# Altium PCB BMS_slave.PcbDoc (part 5 of 5)
Units mm, origin at the board's own origin, x right, y up, seen from the top; angles counter-clockwise.
Board outline 124.71 x 100.58 mm, 4 copper layers (Layer 1 - Top Layer, Layer 2 - GND, Layer 3 - Signal, Layer 4 - Bottom Layer), stack 1.56 mm thick; 370 components, 202 nets, 969 pads, 371 vias.
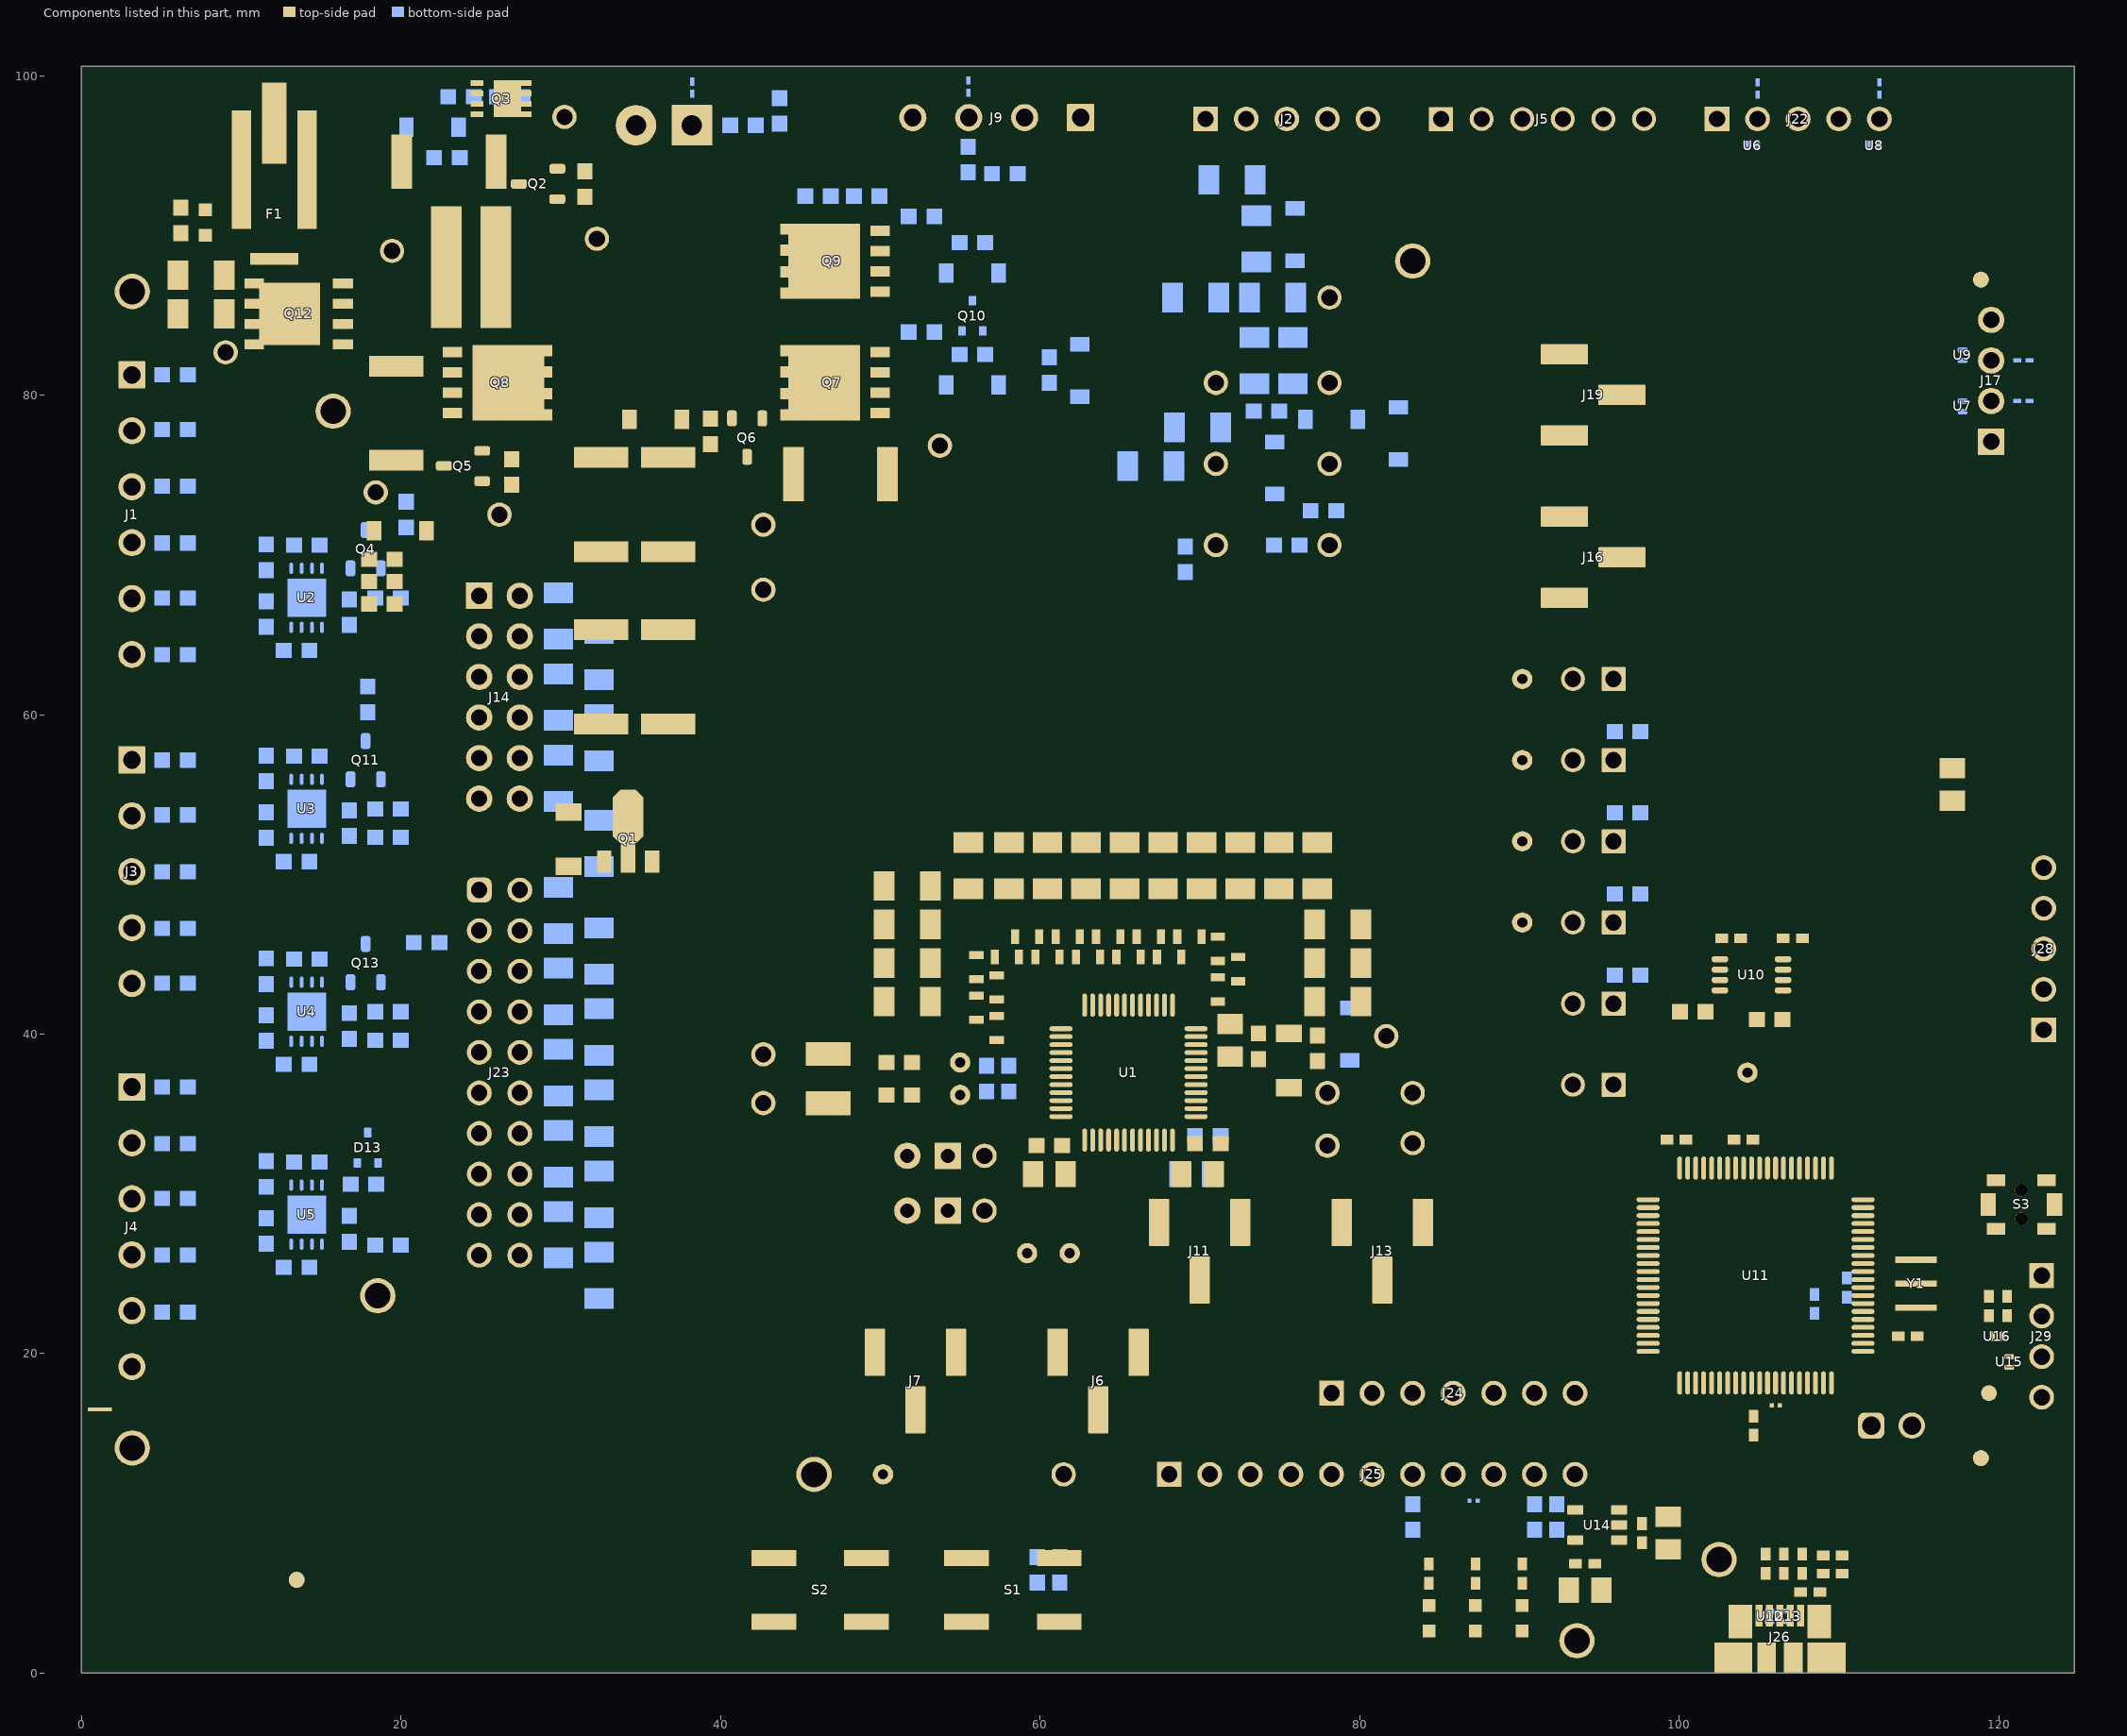
[diagram p6: the components of this part, seen from the top]

## Other copper
Layer 1 - Top Layer:
  region net VSS: 70.231,30.353 72.263,30.353 72.898,30.988 72.898,32.639 71.882,33.655 70.739,33.655 70.739,32.639 70.231,32.131
  pour cut-out: 66.802,11.176 94.615,11.176 94.615,13.716 66.802,13.716
  pour cut-out: 77.076,18.682 77.076,20.955 77.851,20.955 77.851,18.682
  pour cut-out: 85.109,1.848 89.389,1.848 89.389,2.032 85.109,2.032
  region net 3.3V: 94.005,3.658 94.869,2.794 94.869,1.524 93.98,0.635 91.694,0.635 91.059,1.27 91.059,6.011 90.72,6.35 83.693,6.35 83.312,6.731 83.312,8.636 83.693,9.017 93.675,9.017 94.005,8.687
  region net VBUS: 105.207,2.899 105.207,5.172 104.534,5.845 104.534,7.496 103.391,8.639 95.771,8.639 95.644,8.512 95.644,7.607 98.422,4.829 104.508,4.829 104.775,4.563 104.775,2.899
  region net QGND: 96.266,4.191 94.652,4.191 94.285,4.558 94.285,9.195 94.691,9.601 96.977,9.601 97.155,9.779 97.155,10.668 97.663,11.176 99.949,11.176 100.203,10.922 100.203,9.144 100,8.941 95.682,8.941 95.377,8.636 95.377,7.366 96.672,6.071 96.672,4.597 96.647,4.572
  pour cut-out: 94.28,8.961 94.28,9.317 94.564,9.601 95.58,9.601 95.58,9.881 94.132,9.881 93.98,9.728 93.98,8.961
  region net NetJ26_6: 104.572,4.318 104.572,2.184 104.826,1.93 107.747,1.93 108.026,2.21 108.026,4.394 108.331,4.699 108.331,5.334 108.458,5.461 109.454,5.461 110.49,4.425 110.49,-0.051 102.184,-0.051 102.184,3.632 102.87,4.318
  region net QGND: 118.872,17.272 119.38,16.764 120.523,16.764 120.523,18.034 118.872,18.034
  pour cut-out: 96.647,17.272 113.157,17.272 113.157,33.147 96.647,33.147
  region net QGND: 113.487,24.79 113.563,24.867 116.154,24.867 116.357,25.07 116.764,25.07 116.764,23.698 116.357,23.698 116.154,23.901 113.563,23.901 113.487,23.978
  pour cut-out: 123.943,27.056 123.943,31.618 118.881,31.618 118.881,27.056
  pour cut-out: 35.941,48.375 35.953,48.387 36.957,48.387 36.957,48.641 35.941,48.641
  pour cut-out: 51.27,40.731 52.108,40.731 52.108,50.582 51.27,50.582
  region net VSS: 17.018,86.106 17.018,78.613 16.256,77.851 15.24,77.851 14.478,78.613 14.478,81.661 15.621,82.804 15.621,86.106
  region net NetF1_2: 12.319,90.424 14.986,87.757 14.986,82.931 13.843,81.788 8.382,81.788 7.239,82.931 7.239,85.725 7.62,86.106 9.652,86.106 10.033,86.487 10.033,89.154 10.668,89.789 11.176,89.789 11.811,90.424
  region net NetQ5_3: 23.622,74.676 23.241,74.295 20.32,74.295 19.431,75.184 17.907,75.184 17.526,75.565 17.526,77.47 18.034,77.978 20.955,77.978 21.463,77.47 21.463,76.835 21.971,76.327 23.241,76.327 23.622,75.946
  pour cut-out: 17.138,77.47 17.138,81.407 17.399,81.407 17.653,81.153 17.653,77.851 17.272,77.47
  region net 16P: 1.016,79.375 0.254,80.137 0.254,91.567 0.254,99.568 1.016,100.33 11.049,100.33 11.811,99.568 11.811,93.948 11.811,91.186 10.922,90.297 9.398,90.297 8.509,91.186 8.128,91.186 5.588,91.186 4.953,90.551 4.953,84.074 7.112,81.915 7.112,80.137 6.35,79.375
  region net FBAT: 12.319,99.568 13.081,100.33 24.638,100.33 25.273,99.695 25.273,98.171 25.121,98.019 24.105,98.019 23.876,97.79 23.876,79.756 23.749,79.629 19.304,79.629 17.526,81.407 17.526,88.011 17.018,88.519 14.986,88.519 12.319,91.186
  region net NetQ2_3: 24.892,92.837 28.067,92.837 28.067,96.52 27.686,96.901 27.051,96.901 25.781,96.901 24.384,95.504 24.384,93.345
  region net NetD2_1: 35.179,79.121 36.957,77.343 37.973,77.343 38.481,76.835 38.481,73.279 37.846,72.644 30.734,72.644 30.099,73.279 30.099,77.343 31.877,79.121
  region net CD: 24.384,91.059 24.384,77.724 24.384,75.336 27.267,75.336 28.28,76.349 29.178,77.248 29.4,77.47 31.559,79.629 35.306,79.629 37.084,77.851 41.275,77.851 41.656,78.232 41.656,79.121 42.164,79.629 43.053,79.629 43.561,79.121 43.561,78.232 43.815,77.978 48.387,77.978 48.768,78.359 48.768,90.932 48.641,91.059 27.686,91.059 26.924,91.821 24.892,91.821 24.384,91.313
  region net CPACK+: 25.781,97.917 25.781,97.409 28.194,97.409 28.905,96.698 28.905,93.472 32.258,93.472 33.782,91.948 43.307,91.948 44.196,92.837 44.196,98.298 43.307,99.187 36.83,99.187 35.687,100.33 26.416,100.33 25.781,99.695
  region net PACK+: 57.023,97.282 57.023,75.438 54.61,73.025 48.26,73.025 47.752,73.533 47.752,76.708 49.276,78.232 49.276,81.661 49.403,81.788 50.8,81.788 51.181,82.169 51.181,83.439 50.419,84.201 49.657,84.201 49.276,84.582 49.276,89.281 49.403,89.408 50.8,89.408 51.181,89.789 51.181,91.313 50.546,91.948 48.857,91.948 47.752,93.053 47.752,96.774 47.752,97.917 49.022,99.187 55.118,99.187
  region net QGND: 101.778,42.951 103.17,42.951 103.251,42.871 103.251,42.723 101.778,42.723
  region net QGND: 116.586,55.067 116.408,55.245 115.759,55.245 115.759,54.356 118.429,54.356 118.429,55.245 117.729,55.245 117.551,55.067
  region net PGND: 116.586,56.185 116.408,56.007 115.759,56.007 115.759,56.896 118.429,56.896 118.429,56.007 117.729,56.007 117.551,56.185
  region net QGND: 116.332,54.991 116.078,54.737 116.078,53.467 118.11,53.467 118.11,54.737 117.856,54.991
  region net PGND: 117.856,56.261 118.11,56.515 118.11,57.785 116.078,57.785 116.078,56.515 116.332,56.261
  pour cut-out: 118.237,78.359 118.237,85.979 120.777,85.979 120.777,78.359
  region net 4P: 3.048,34.798 4.318,34.798 12.192,42.672 15.367,42.672 17.907,40.132 17.907,37.465 21.336,34.036 21.336,26.797 20.701,26.162 19.685,26.162 19.05,26.797 19.05,29.448 16.748,31.75 2.921,31.75 2.032,32.639 2.032,33.782
  region net 8P: 13.716,48.514 19.05,43.18 19.05,39.624 19.685,38.989 20.701,38.989 21.336,39.624 21.336,48.26 18.034,51.562 18.034,54.356 17.018,55.372 11.938,55.372 8.368,51.802 3.034,51.802 2.032,50.8 2.032,49.53 3.048,48.514
  region net 12P: 2.032,66.802 3.175,65.659 8.509,65.659 19.072,55.095 19.072,52.197 19.685,51.584 20.679,51.584 21.291,52.197 21.291,59.01 16.039,64.262 16.039,66.802 16.039,67.781 14.986,68.834 3.175,68.834 2.032,67.691
  pour cut-out: 23.622,53.467 28.702,53.467 28.702,68.707 23.622,68.707
  region net VSS: 19.05,67.785 21.049,67.785 22.733,69.469 22.733,72.517 21.336,72.517 19.05,70.231
  region net NetC71_1: 30.226,62.103 29.464,61.341 29.464,52.832 30.226,52.07 33.274,52.07 33.655,51.689 33.655,50.038 34.798,50.038 34.798,51.689 35.179,52.07 35.687,52.07 36.83,53.213 36.83,55.626 39.751,58.547 39.751,61.341 38.989,62.103
  region net NetR6_1: 34.29,63.373 33.528,62.611 30.226,62.611 29.464,63.373 29.464,71.374 30.226,72.136 34.29,72.136
  region net NetR5_1: 34.925,63.373 35.687,62.611 38.989,62.611 39.751,63.373 39.751,71.374 38.989,72.136 34.925,72.136
  region net PGND: 48.26,37.592 48.768,38.1 48.768,38.354 48.26,38.862 48.26,50.8 68.199,70.739 68.199,97.282 66.294,99.187 59.436,99.187 57.531,97.282 57.531,75.184 37.592,55.245 37.592,41.402 41.402,37.592
  region net NetQ6_3: 41.275,75.311 43.561,73.025 46.736,73.025 47.244,73.533 47.244,76.327 46.787,76.784 41.275,76.784
  pour cut-out: 79.032,48.065 78.194,48.065 78.194,40.69 79.032,40.684
  pour cut-out: 54.193,50.965 54.193,50.127 78.649,50.127 78.649,50.965
  region net VSS: 0.889,17.018 0.635,17.272 0,17.272 0,15.748 0.635,15.748 0.889,16.002
  region net BAT-: 1.397,11.557 2.921,10.033 38.862,10.033 48.26,19.431 48.26,35.56 48.768,36.068 48.768,36.322 48.26,36.83 41.402,36.83 37.592,33.02 37.592,24.003 34.29,20.701 3.302,20.701 1.397,18.796
  pour cut-out: 51.181,12.446 51.562,12.446 54.356,15.24 54.356,20.447 52.451,20.447 52.451,14.732 51.181,13.462
  pour cut-out: 61.087,33.147 69.977,33.147 69.977,42.037 61.087,42.037
  region net VSS: 73.152,38.989 73.152,37.338 74.422,36.068 76.454,36.068 76.454,37.338 74.803,38.989
Layer 2 - GND:
  pour cut-out: 40.005,95.123 33.02,95.123 33.02,98.552 40.005,98.552
  pour cut-out: 110.744,14.224 115.824,14.224 115.824,16.764 110.744,16.764
  pour cut-out: 53.34,86.348 54.864,86.348 54.864,86.614 53.34,86.614
  pour cut-out: 55.527,96.131 57.15,96.131 57.15,96.393 55.527,96.393
  pour cut-out: 118.237,78.359 118.237,85.979 120.777,85.979 120.777,78.359
  pour cut-out: 23.622,53.467 28.702,53.467 28.702,68.707 23.622,68.707
Layer 3 - Signal:
  pour cut-out: 58.039,52.439 79.756,52.439 79.756,53.086 58.039,53.086
  pour cut-out: 23.241,68.707 23.241,53.467 28.702,53.467 28.702,68.707
  pour cut-out: 39.878,95.123 33.02,95.123 33.02,98.552 39.878,98.552
  pour cut-out: 53.34,86.348 54.864,86.348 54.864,86.614 53.34,86.614
  pour cut-out: 55.527,96.131 57.15,96.131 57.15,96.393 55.527,96.393
  pour cut-out: 94.746,36.26 94.742,35.179 94.996,35.179 94.996,36.26
  pour cut-out: 110.744,14.224 115.824,14.224 115.824,16.764 110.744,16.764
  pour cut-out: 123.848,19.812 123.848,22.352 121.516,22.352 121.516,19.812
  pour cut-out: 120.624,28.437 120.624,30.237 121.158,30.237 121.158,28.437
  pour cut-out: 118.237,78.359 118.237,85.979 120.777,85.979 120.777,78.359
  pour cut-out: 23.749,24.892 23.749,50.292 30.226,50.292 30.226,24.892
Layer 4 - Bottom Layer:
  pour cut-out: 7.523,49.309 7.523,44.036 7.112,44.036 7.112,49.309
  region net VSS: 12.878,29.921 12.878,27.483 15.418,27.483 16.002,28.067 17.272,28.067 17.272,29.21 16.002,29.21 15.291,29.921
  region net 4P: 12.878,42.621 12.878,40.183 15.418,40.183 16.002,40.767 18.923,40.767 18.923,41.91 16.002,41.91 15.291,42.621
  region net 8P: 12.878,55.321 12.878,52.883 15.418,52.883 16.002,53.467 18.923,53.467 18.923,54.61 16.002,54.61 15.291,55.321
  pour cut-out: 32.421,15.934 32.421,61.559 31.623,62.357 28.067,62.357 27.432,61.722 27.432,60.109 24.996,57.673 24.996,19.685 26.162,18.519 29.809,18.519 29.809,15.934
  pour cut-out: 7.523,66.454 7.523,64.61 7.087,64.61 7.087,66.454
  pour cut-out: 7.523,64.61 7.523,66.454 7.16,66.454 7.16,64.61
  region net 12P: 12.878,68.529 12.878,66.091 15.418,66.091 16.002,66.675 18.923,66.675 18.923,67.818 16.002,67.818 15.291,68.529
  pour cut-out: 7.523,80.424 7.523,75.151 6.934,75.151 6.934,80.424
  region net FBAT: 23.622,98.298 23.495,98.171 22.86,98.171 22.606,97.917 22.606,94.361 19.762,94.361 19.762,99.264 20.193,99.695 23.241,99.695 23.622,99.314
  region net NetC29_1: 24.003,98.171 26.543,98.171 26.543,99.314 26.162,99.695 24.384,99.695 24.003,99.314
  region net CPACK+: 27.051,98.044 27.432,97.663 28.829,97.663 28.829,99.695 27.432,99.695 27.051,99.314
  pour cut-out: 33.038,96.888 33.038,94.818 33.35,94.818 33.35,96.888
  region net FBAT: 45.847,91.694 33.02,91.694 31.623,93.091 29.718,93.091 27.686,91.059 22.098,91.059 21.844,91.313 21.844,92.71 22.098,92.964 26.543,92.964 28.829,95.25 32.512,95.25 34.29,93.472 45.593,93.472 45.847,93.218
  region net NetC34_2: 41.656,96.266 41.91,96.012 44.069,96.012 44.323,96.266 44.323,97.409 44.069,97.663 41.91,97.663 41.656,97.409
  region net NetC37_1: 46.355,91.694 48.895,91.694 48.895,93.472 46.355,93.472
  region net PGND: 37.846,98.603 37.465,98.603 37.084,98.984 37.084,100.254 39.37,100.254 39.37,98.984 38.989,98.603 38.608,98.603 38.608,99.238 38.481,99.365 37.973,99.365 37.846,99.238
  region net CPACK+: 41.148,96.012 40.64,95.504 36.957,95.504 36.703,95.758 36.703,97.917 36.957,98.171 37.973,98.171 38.1,98.298 38.1,99.111 38.354,99.111 38.354,98.298 38.481,98.171 40.64,98.171 41.148,97.663
  region net PGND: 42.672,100.203 42.672,98.552 43.18,98.044 44.196,98.044 44.704,98.552 44.704,100.203
  region net PACK+: 49.403,91.948 50.8,91.948 51.181,92.329 51.181,94.361 49.784,94.361 49.403,93.98
  region net PACK+: 55.372,99.187 55.372,98.552 54.61,97.79 54.61,94.996 56.388,94.996 56.388,97.79 55.626,98.552 55.626,99.187
  region net PGND: 55.118,98.679 54.737,98.679 54.356,99.06 54.356,100.33 56.642,100.33 56.642,99.06 56.261,98.679 55.88,98.679 55.88,99.314 55.753,99.441 55.245,99.441 55.118,99.314
  region net NetC42_2: 54.991,94.488 54.991,93.218 57.531,93.218 57.531,94.488
  region net PGND: 58.039,93.218 58.42,92.837 59.69,92.837 59.69,94.869 58.42,94.869 58.039,94.488
  pour cut-out: 80.366,37.529 80.465,37.529 81.8,38.865 81.8,42.037 81.546,42.291 81.356,42.481 78.384,42.481 78.384,39.115 77.585,38.316 77.585,35.699 78.232,35.052 79.502,35.052 80.366,35.916
  pour cut-out: 81.788,96.012 82.157,96.012 82.157,96.215 81.788,96.215
  region net PGND: 118.237,79.172 118.237,78.867 117.272,78.867 117.094,79.045 117.094,79.096 117.17,79.172
  region net PGND: 118.237,82.626 118.237,82.906 117.246,82.906 117.094,82.753 117.094,82.702 117.17,82.626
  region net PGND: 120.904,78.994 121.285,78.613 123.063,78.613 123.063,83.185 121.285,83.185 120.904,82.804 120.904,82.55 121.539,82.55 121.666,82.423 121.666,81.915 121.539,81.788 120.904,81.788 120.904,80.01 121.539,80.01 121.666,79.883 121.666,79.375 121.539,79.248 120.904,79.248
  pour cut-out: 118.237,78.359 118.237,85.979 120.777,85.979 120.777,78.359
  region net PGND: 104.445,96.181 104.379,96.247 104.299,96.247 104.267,96.215 104.267,95.047 104.292,95.021 104.369,95.021 104.445,95.098
  region net PGND: 104.521,98.552 104.14,98.552 103.759,98.933 103.759,100.203 106.045,100.203 106.045,98.933 105.664,98.552 105.283,98.552 105.283,99.187 105.156,99.314 104.648,99.314 104.521,99.187
  region net PGND: 112.065,96.181 111.999,96.247 111.919,96.247 111.887,96.215 111.887,95.047 111.912,95.021 111.989,95.021 112.065,95.098
  region net PGND: 112.141,98.552 111.76,98.552 111.379,98.933 111.379,100.203 113.665,100.203 113.665,98.933 113.284,98.552 112.903,98.552 112.903,99.187 112.776,99.314 112.268,99.314 112.141,99.187
  region net QGND: 105.08,3.658 107.442,3.658 107.442,3.861 105.08,3.861
  pour cut-out: 107.315,8.216 107.315,8.763 106.934,9.144 106.934,19.685 107.442,20.193 109.347,20.193 109.855,19.685 110.49,19.685 110.871,20.066 110.871,22.098 110.49,22.479 109.855,22.479 108.356,20.98 107.086,20.98 106.172,20.066 106.172,10.033 104.648,8.509 104.648,8.001 105.029,7.62 106.934,7.62 107.315,8.001
  pour cut-out: 111.171,22.749 111.171,22.398 110.744,21.971 110.172,21.971 110.172,22.749
  pour cut-out: 123.975,39.103 123.546,39.103 123.546,47.879 123.975,47.879
  pour cut-out: 66.167,76.969 67.557,76.969 67.564,73.66 66.167,73.66
  pour cut-out: 69.431,76.672 70.485,76.672 70.485,79.284 69.431,79.284
  region net PGND: 61.722,78.867 63.754,78.867 63.754,80.899 61.722,80.899
  pour cut-out: 69.304,84.8 70.358,84.8 70.358,87.412 69.304,87.412
  pour cut-out: 71.59,92.166 72.644,92.166 72.644,94.778 71.59,94.778
  pour cut-out: 74.839,89.37 74.839,90.424 72.227,90.424 72.227,89.37
  pour cut-out: 72.068,79.466 77.03,79.466 77.03,80.264 72.068,80.264
  pour cut-out: 77.125,81.75 77.125,82.804 72.1,82.804 72.1,81.75
  pour cut-out: 23.622,53.467 28.702,53.467 28.702,68.707 23.622,68.707
  region net CD: 48.768,91.059 32.385,91.059 27.178,85.852 27.178,76.067 27.997,76.067 31.559,79.629 35.56,79.629 36.322,78.867 48.768,78.867
  region net PACK+: 55.499,77.343 56.261,76.581 66.167,76.581 66.421,76.327 66.421,74.676 66.167,74.422 55.372,74.422 54.737,74.422 53.213,75.946 52.705,76.454 52.705,81.534 54.483,83.312 54.483,84.328 54.737,84.582 55.245,84.582 55.499,84.328
  region net PACK+: 55.245,90.297 55.499,90.043 55.499,87.249 54.991,86.741 53.086,86.741 53.086,89.789 53.594,90.297
  pour cut-out: 61.732,9.652 61.732,11.684 61.214,11.684 61.214,9.652
  pour cut-out: 64.173,6.759 65.913,6.759 65.913,7.112 64.173,7.112
  pour cut-out: 66.916,11.28 66.916,13.612 94.361,13.612 94.361,11.28
  region net VSS: 70.104,32.131 72.898,32.131 72.898,30.988 72.517,30.607 71.628,30.607 71.374,30.353 70.104,30.353
  pour cut-out: 7.523,32.291 7.523,27 7.222,27 7.112,27 7.112,32.291

## Silkscreen, mask and mechanical layers (free items; w line width, h text height)
Top Overlay:
  text "EXT SPI" at 104.013,99.06 h1.91
  text "CPACK+" at 27.813,95.504 h1.27
  text "CPACK+" at 33.02,92.456 h1.91
  text "TS2" at 81.153,92.329 h1.91 r90
  text "PACK+" at 51.08,92.062 h1.91
  text "PACK-" at 58.286,92.062 h1.91
  text "VSS" at 70.993,91.948 h1.91 r90
  text "VSS" at 85.725,91.948 h1.91 r90
  text "REG1" at 76.073,91.059 h1.91 r90
  text "REG2" at 73.533,90.805 h1.91 r90
  text "DCHG" at 93.345,90.551 h1.91 r90
  text "DDSG" at 95.885,90.551 h1.91 r90
  text "Input 6A max" at 51.689,90.424 h1.91
  text "REGIN" at 78.613,90.17 h1.91 r90
  text "PACK-" at 102.997,90.043 h1.91 r90
  text "SPI_CS" at 105.537,89.408 h1.91 r90
  text "BAT+" at 0.635,88.646 h1.91
  text "SPI_CLK" at 108.077,88.265 h1.91 r90
  text "DFETOFF" at 88.265,87.63 h1.91 r90
  text "CFETOFF" at 90.805,87.63 h1.91 r90
  text "SPI_MISO" at 110.617,87.503 h1.91 r90
  text "SPI_MOSI" at 113.157,87.503 h1.91 r90
  text "FBAT" at 18.034,87.122 h1.27
  text "CD" at 31.496,86.741 h1.27
  text "RST_SHUT" at 98.425,86.487 h1.91 r90
  text "GND" at 81.534,83.82 h1.91
  text "PACK" at 76.581,83.058 h1.27
  text "uC_SCL" at 97.663,81.915 h1.91
  text "FUSE" at 9.779,81.28 h1.27
  text "CELL16" at 7.52,79.756 h1.91
  text "SCL" at 88.392,79.248 h1.91
  text "Dg" at 70.314,77.976 h1.27
  text "DSG" at 76.962,77.978 h1.27
  text "EXT I2C" at 117.856,77.724 h1.91 r90
  text "CELL15" at 7.52,77.156 h1.91
  text "uC_SPI_CLK" at 97.663,76.835 h1.91
  text "GND" at 13.97,75.692 h1.91
  text "CELL14" at 7.52,73.651 h1.91
  text "PACK+" at 52.07,73.533 h1.27
  text "FUSEPIN" at 19.431,72.898 h1.27
  text "LD" at 70.358,72.898 h1.27
  text "PCHG" at 76.581,72.898 h1.27
  text "uC_SDA" at 97.663,71.755 h1.91
  text "CELL13" at 7.52,70.146 h1.91
  text "Pcg" at 25.146,69.596 h1.27
  text "SDA" at 88.392,69.215 h1.91
  text "Pdg" at 41.656,69.088 h1.27
  text "CHG" at 69.977,67.818 h1.27
  text "PDSG" at 76.708,67.818 h1.27
  text "16" at 21.336,66.802 h1.91
  text "uC_SPI_MISO_A" at 97.663,66.675 h1.91
  text "CELL12" at 7.52,66.641 h1.91
  text "Cg" at 41.91,64.897 h1.27
  text "15" at 21.336,64.262 h1.91
  text "CELL11" at 7.52,63.135 h1.91
  text "14" at 21.336,61.722 h1.91
  text "CFETOFF" at 83.947,61.468 h1.27
  text "uC_SPI_CS" at 90.17,59.309 h1.91
  text "13" at 21.336,59.182 h1.91
  text "12" at 21.336,56.642 h1.91
  text "CELL10" at 7.52,56.557 h1.91
  text "HDQ" at 86.487,56.007 h1.27
  text "Cell simulator" at 30.226,55.499 h1.91 r90
  text "HDQ_PU" at 91.44,54.229 h1.91
  text "11" at 21.336,54.102 h1.91
  text "CELL9" at 7.52,53.052 h1.91
  text "SDA" at 86.741,51.054 h1.27
  text "CELL8" at 7.52,49.546 h1.91
  text "SDA_PU" at 91.44,49.149 h1.91
  text "10" at 21.336,48.387 h1.91
  text "SCL" at 86.741,46.101 h1.27
  text "CELL7" at 7.52,46.041 h1.91
  text "9" at 22.225,45.847 h1.91
  text "SCL_PU" at 91.44,44.069 h1.91
  text "8" at 22.225,43.307 h1.91
  text "CELL6" at 7.52,42.536 h1.91
  text "7" at 22.225,40.767 h1.91
  text "ALERT_PU" at 90.424,38.989 h1.91
  text "BAT" at 82.677,38.735 h1.27
  text "6" at 22.225,38.227 h1.91
  text "SRN" at 56.007,37.846 h1.27
  text "CELL5" at 7.52,35.957 h1.91
  text "SRP" at 56.007,35.814 h1.27
  text "5" at 22.225,35.687 h1.91
  text "CP1" at 79.121,35.179 h1.27
  text "GND" at 84.328,35.179 h1.27
  text "BAT-" at 37.846,34.417 h1.91
  text "uC_HDQ" at 91.186,33.909 h1.91
  text "TS1" at 55.499,33.401 h1.27
  text "4" at 22.225,33.147 h1.91
  text "Input 72V max" at 17.653,32.766 h1.91 r90
  text "Input 6A max" at 19.812,32.766 h1.91 r90
  text "CELL4" at 7.52,32.452 h1.91
  text "BREG" at 79.121,32.004 h1.27
  text "REGIN" at 84.328,32.004 h1.27
  text "Cell simulator" at 30.226,31.623 h1.91 r90
  text "3" at 22.225,30.607 h1.91
  text "CELL3" at 7.52,28.947 h1.91
  text "2" at 22.225,28.067 h1.91
  text "ALERT" at 60.579,27.178 h1.27
  text "PU" at 65.786,26.924 h1.91 r90
  text "PD" at 75.438,26.924 h1.91 r90
  text "TS3" at 55.499,25.908 h1.27
  text "1" at 22.352,25.527 h1.91
  text "CELL2" at 7.52,25.442 h1.91
  text "uC_HDQ" at 86.868,24.384 h1.91 r90
  text "REG18" at 57.277,23.495 h1.27
  text "CELL1" at 7.52,21.937 h1.91
  text "uC_SPI_MOSI" at 76.962,21.209 h1.91 r90
  text "GND" at 16.637,19.177 h1.91
  text "HDQ" at 82.042,19.177 h1.91 r90
  text "PD" at 57.658,18.796 h1.91 r90
  text "PU" at 59.436,18.796 h1.91 r90
  text "PD" at 69.088,18.796 h1.91 r90
  text "EXT" at 47.879,18.669 h1.91 r90
  text "BAT-" at 7.52,18.431 h1.91
  text "QGND" at 116.205,15.367 h1.91
  text "CFETOFF" at 70.612,15.113 h1.91 r90
  text "TS2" at 52.832,11.557 h1.91 r90
  text "TS2" at 49.149,9.652 h1.27
  text "REG1" at 59.563,9.398 h1.27
  text "VBUS" at 100.584,9.271 h1.91
  text "GND" at 44.069,8.89 h1.91
  text "DFETOFF" at 64.262,6.985 h1.91 r90
  text "BQ76952EVM" at 18.415,4.953 h2.75
  text "'.PRJ_Number'.PCB_Rev" at 18.415,2.667 h2.75
  text "USB" at 111.379,1.524 h1.91
  text "3.3V" at 95.885,1.016 h1.91
  text "WAKE" at 43.688,0.254 h1.91
  text "RESET" at 55.626,0.254 h1.91
M1 Board Outline:
  lines w0.254: -0.508,-0.508 -0.508,101.092 125.222,101.092 125.222,-0.508 -0.508,-0.508
  text ".Layer_Name" at 14.148,-22.314 h1.52
M2 Board Dimensions:
  rectangle: -0.508,-7.493 2.667,-4.318
  rectangle: 2.667,-10.668 12.192,-7.493
  lines w0.178: -0.508,-7.493 24.892,-7.493 ; 2.667,-10.668 2.667,-4.318 ; 5.842,-10.668 5.842,-4.318 ; 12.192,-10.668 12.192,-4.318 ; 18.542,-10.668 18.542,-4.318 ; -0.508,-10.668 -0.508,-4.318 24.892,-4.318 24.892,-10.668 -0.508,-10.668
  text ".Layer_Name" at 14.148,-22.314 h1.52
M3 3D STEP Top:
  text ".Layer_Name" at 14.148,-22.314 h1.52
M5 Assembly Top:
  lines w0.254: -7.925,-24.134 159.715,-24.134 ; -7.925,-18.97 159.766,-18.97 ; -7.925,-13.805 -7.925,-29.299 93.802,-29.299 159.766,-29.299 159.766,-13.805 -7.912,-13.805 -7.912,-29.299 32.106,-29.299 ; 54.686,-29.299 54.686,-13.805 ; 86.868,-18.97 86.868,-13.805 ; 108.204,-18.97 108.204,-13.805 ; 124.003,-29.464 124.003,-24.312
  text "COMPONENTS MARKED 'DNP' SHOULD NOT BE POPULATED." at 28.791,-8.598 h1.52
  text "ASSEMBLY VARIANT:" at 28.778,-11.532 h1.52
  text ".VariantName" at 55.093,-11.532 h1.52
  text "PCB VIEWED FROM TOP SIDE" at -6.312,-17.162 h1.52
  text "BOARD #:" at 56.591,-17.162 h1.52
  text ".PRJ_Number" at 70.447,-17.162 h1.52
  text "REV:" at 91.897,-17.162 h1.52
  text ".PCB_Rev" at 99.301,-17.162 h1.52
  text "SVN REV:" at 113.182,-17.162 h1.52
  text ".VersionControl_RevNumber" at 126.035,-17.162 h1.52
  text "TID #:" at 56.591,-22.327 h1.52
  text ".TID" at 70.447,-22.327 h1.52
  text "PLOT NAME =" at -6.312,-27.542 h1.52
  text ".plot_File_Name" at 14.148,-27.542 h1.52
  text "GENERATED    :" at 56.642,-27.542 h1.52
  text ".Print_Date" at 78.727,-27.542 h1.52
  text ".Print_Time" at 97.244,-27.542 h1.52
  text "TEXAS INSTRUMENTS" at 129.362,-27.542 h1.52
M9 Title Sheet:
  drawing of 1178 lines, arcs and shapes, not listed
  text "1" at 18.284,203.619 h1.78
  text "2" at 81.674,203.619 h1.78
  text "3" at 144.903,203.619 h1.78
  text "4" at 208.572,203.619 h1.78
  text "5" at 272.047,203.619 h1.78
  text "6" at 335.674,203.619 h1.78
  text "A" at -11.087,174.587 h1.78
  text "A" at 364.833,174.587 h1.78
  text "B" at -11.087,114.135 h1.78
  text "B" at 364.833,114.135 h1.78
  text "C" at -11.087,53.81 h1.78
  text "C" at 364.833,53.81 h1.78
  text "PROJECT TITLE:" at 287.617,6.54 h1.14
  text ".PRJ_Title" at 288.887,3.154 h1.78
  text "DESIGNED FOR:" at 287.617,-1.105 h1.14
  text ".PRJ_Customer" at 288.887,-4.661 h1.78
  text "D" at -11.087,-6.388 h1.78
  text "D" at 364.833,-6.388 h1.78
  text "FILE NAME:" at 287.617,-8.725 h1.14
  text ".PCB_File_Name_No_Path" at 288.887,-11.773 h1.78
  text "Texas Instruments (TI) and/or its licensors do not warrant the accuracy or completeness of this specification" at 161.392,-15.884 h1.14
  text "ENGINEER:" at 287.617,-16.091 h1.14
  text "LAYOUT BY:" at 325.844,-16.091 h1.14
  text "or any information contained therein. TI and/or its licensors do not warrant that this design will meet" at 160.249,-18.745 h1.14
  text ".PRJ_Engineer" at 288.887,-20.028 h1.78
  text "JMM" at 325.933,-20.828 h2.54
  text "s  o  l  u  t  i  o  n  s" at 347.726,-20.904 h1.73
  text "the specifications, will be suitable for your application or fit for any particular purpose, or will operate in" at 160.249,-21.607 h1.14
  text ".Layer_Name" at 14.148,-22.314 h1.52
  text "ALTIUM DESIGNER VERSION:" at 325.844,-23.965 h1.14
  text "an implementation. TI and/or its licensors do not warrant that the design is production worthy. You should" at 160.249,-24.469 h1.14
  text "completely validate and test your design implementation to confirm the system functionality for your application." at 161.392,-27.33 h1.14
  text ".print_Scale" at 288.887,-27.351 h1.78
  text ".Application_BuildNumber" at 327.127,-27.351 h1.78
  text "1" at 18.284,-32.601 h1.78
  text "2" at 81.674,-32.601 h1.78
  text "3" at 144.903,-32.601 h1.78
  text "4" at 208.572,-32.601 h1.78
  text "5" at 272.047,-32.601 h1.78
  text "6" at 335.674,-32.601 h1.78
M10 Fab Notes:
  drawing of 189 lines, arcs and shapes, not listed
  text "DESIGN INFORMATION" at 313.995,160.939 h1.52
  text "MIN. TRACK WIDTH:" at 297.623,157.583 h1.52
  text "8" at 325.468,157.583 h1.52
  text "MIL" at 329.399,157.583 h1.52
  text "MIN. CLEARANCE:" at 297.623,154.43 h1.52
  text "0.2" at 323.944,154.43 h1.52
  text "mm" at 329.399,154.43 h1.52
  text "MIN. VIA PAD SIZE:" at 297.623,151.277 h1.52
  text "20" at 324.706,151.277 h1.52
  text "MIL" at 329.399,151.277 h1.52
  text "0.05mm (2MIL)" at 315.276,147.978 h1.52
  text "MINIMUM ANNULAR RING" at 289.261,147.769 h1.52
  text "EXTERNAL" at 333.26,147.769 h1.52
  text "PER" at 294.341,144.972 h1.52
  text "IPC-D-275 CLASS 2 LEVEL C" at 299.929,144.972 h1.52
  text "MIL, HOLES" at 337.73,142.42 h1.52
  text "+/-" at 327.762,142.201 h1.52
  text "+/-" at 349.453,142.201 h1.52
  text "REGISTRATION TOLERANCES:" at 289.261,142.174 h1.52
  text "METAL" at 319.735,142.174 h1.52
  text "5" at 334.371,142.175 h1.52
  text "3" at 355.529,142.175 h1.52
  text "MIL" at 358.482,142.174 h1.52
  text "HOLE SIZE TOLERANCE (UNLESS OTHERWISE SPECIFIED):" at 289.261,139.677 h1.52
  text "+/-" at 349.453,139.604 h1.52
  text "3" at 355.529,139.577 h1.52
  text "MIL" at 358.482,139.577 h1.52
  text "MATERIAL:" at 287.362,136.081 h1.52
  text "FR-4 High Tg" at 312.418,132.816 h1.52
  text "X" at 308.749,132.614 h1.52
  text "FR-408" at 298.055,132.499 h1.52
  text "OTHER" at 335.85,132.499 h1.52
  text "62 MIL (1.6mm) +/-10%" at 306.186,128.866 h1.52
  text "X" at 303.135,128.804 h1.52
  text "THICKNESS:" at 289.261,128.657 h1.52
  text "OTHER" at 338.822,128.657 h1.52
  text "TOLERANCE:" at 289.261,125.144 h1.52
  text "X" at 310.806,125.144 h1.52
  text "ANSI IPC-6012 TYPE 3 CLASS 2" at 315.328,125.144 h1.52
  text "OTHER +/-" at 315.327,121.481 h1.52
  text "BOW & TWIST:" at 289.261,117.794 h1.52
  text "X" at 310.806,117.794 h1.52
  text "ANSI IPC-6012 TYPE 3 CLASS 2" at 315.328,117.794 h1.52
  text "OTHER +/-" at 315.327,114.068 h1.52
  text "DRILLING:" at 287.362,110.75 h1.52
  text "NC_DRILL FILES" at 332.091,108.078 h1.52
  text "REFERENCE:" at 289.261,107.978 h1.52
  text "X" at 305.955,107.976 h1.52
  text "AS SHOWN" at 310.476,107.978 h1.52
  text "X" at 328.84,107.978 h1.52
  text "OTHER" at 339.66,104.365 h1.52
  text "PTH COPPER THICKNESS:" at 289.253,104.275 h1.52
  text "X" at 318.189,104.275 h1.52
  text "20-30 um" at 321.44,104.275 h1.52
  text "BOARD FINISH:" at 287.362,100.526 h1.52
  text "SILKSCREEN:" at 291.304,97.729 h1.52
  text "X" at 315.632,97.729 h1.52
  text "TOP" at 318.604,97.729 h1.52
  text "X" at 328.586,97.729 h1.52
  text "BOTTOM" at 331.583,97.729 h1.52
  text "SILKSCREEN COLOR:" at 291.304,93.787 h1.52
  text "X" at 315.607,93.787 h1.52
  text "WHITE" at 318.604,93.787 h1.52
  text "OTHER" at 331.583,93.787 h1.52
  text "X" at 318.934,90.144 h1.52
  text "GREEN" at 321.931,90.144 h1.52
  text "OTHER" at 337.628,90.144 h1.52
  text "SOLDER RESIST COLOR:" at 291.304,89.969 h1.52
  text "X" at 318.934,86.226 h1.52
  text "MATTE" at 321.931,86.226 h1.52
  text "SEMI-GLOSS" at 337.617,86.209 h1.52
  text "IMMERSION GOLD (ENIG)" at 314.311,81.837 h1.52
  text "ENEPIG" at 348.285,81.654 h1.52
  text "SURFACE FINISH:" at 287.362,81.628 h1.52
  text "X" at 309.79,81.628 h1.52
  text "IMM. TIN/SILVER OR EQUIV" at 295.732,78.141 h1.52
  text "OTHER" at 332.091,78.041 h1.52
  text "ARRAY/PANEL:" at 287.362,74.094 h1.52
  text "CUT AND TRIM PER M1 BOARD OUTLINE" at 314.311,73.885 h1.52
  text "N.C. ROUTE" at 314.311,70.432 h1.52
  text "X" at 331.787,70.432 h1.52
  text "V. SCORE" at 336.308,70.432 h1.52
  text "CERTIFICATION:" at 287.362,67.152 h1.52
  text "MATERIALS AND WORKMANSHIP FOR ALL PCBS" at 305.777,67.152 h1.52
  text "TO MEET OR EXCEED THE REQUIREMENTS OF:" at 305.777,64.763 h1.52
  text "X" at 296.57,61.495 h1.52
  text "ANSI IPC-A-600F CLASS ->" at 299.821,61.495 h1.52
  text "X" at 341.68,61.495 h1.52
  text "2" at 344.474,61.495 h1.52
  text "1" at 336.473,61.457 h1.52
  text "3" at 353.465,61.457 h1.52
  text "X" at 317.194,57.744 h1.52
  text "RoHS" at 320.445,57.744 h1.52
  text "OTHER" at 336.813,57.744 h1.52
  text "PER ORDER" at 346.899,57.744 h1.52
  text "ALL BOARDS MUST MEET OR EXCEED UL94-V0 REQUIREMENTS." at 288.061,53.837 h1.52
  text "PCB MUST BEAR THE UL94V-0 UL REGISTERED MATERIAL ID NUMBER" at 288.061,50.889 h1.52
  text "ADDITIONAL REQUIREMENTS:" at 287.362,46.586 h1.52
  text "MICROSECTION:" at 289.261,43.865 h1.52
  text "YES" at 312.267,43.865 h1.52
  text "REQUIRED" at 334.149,40.199 h1.52
  text "BARE BOARD ELEC. TEST:" at 289.261,40.126 h1.52
  text "NONE" at 322.427,40.126 h1.52
  text "X" at 331.152,40.126 h1.52
  text "PER ORDER" at 349.185,40.126 h1.52
  text "XX MIL VIAS REQUIRE NON-CONDUCTIVE FILL AND PLANARIZE" at 293.532,34.92 h1.5
  text "XX MIL VIAS REQUIRE CONDUCTIVE FILL AND PLANARIZE" at 293.735,32.279 h1.52
  text "OUTER XX MIL TRACES REQUIRE 50 OHM SINGLE-ENDED IMPEDANCE" at 293.71,28.129 h1.47
  text "LAYER 2 & 3 (INNER LAYERS) XX MIL WIDE, XX MIL SPACE / TRACES REQUIRE 100 OHM DIFFERENTIAL IMPEDANCE" at 293.507,22.142 h1.52
  text ".Layer_Name" at 14.148,-22.314 h1.52
M11 Gerber Information:
  lines w0.254: -7.925,-24.134 159.715,-24.134 ; -7.925,-18.97 159.766,-18.97 ; -7.925,-13.805 -7.925,-29.299 93.802,-29.299 159.766,-29.299 159.766,-13.805 -7.912,-13.805 -7.912,-29.299 32.106,-29.299 ; 54.686,-29.299 54.686,-13.805 ; 86.868,-18.97 86.868,-13.805 ; 108.204,-18.97 108.204,-13.805 ; 124.003,-29.464 124.003,-24.312
  text "ALL ARTWORK VIEWED FROM TOP SIDE" at -6.312,-17.162 h1.52
  text "BOARD #:" at 56.591,-17.162 h1.52
  text ".PRJ_Number" at 70.447,-17.162 h1.52
  text "REV:" at 91.897,-17.162 h1.52
  text ".PCB_Rev" at 99.301,-17.162 h1.52
  text "SVN REV:" at 113.182,-17.162 h1.52
  text ".VersionControl_RevNumber" at 126.035,-17.162 h1.52
  text "LAYER NAME =" at -6.312,-22.314 h1.52
  text "TID #:" at 56.591,-22.327 h1.52
  text ".TID" at 70.447,-22.327 h1.52
  text "PLOT NAME =" at -6.312,-27.542 h1.52
  text ".plot_File_Name" at 14.148,-27.542 h1.52
  text "GENERATED    :" at 56.642,-27.542 h1.52
  text ".Print_Date" at 78.727,-27.542 h1.52
  text ".Print_Time" at 97.244,-27.542 h1.52
  text "TEXAS INSTRUMENTS" at 129.362,-27.542 h1.52
M12 Stackup:
  drawing of 295 lines, arcs and shapes, not listed
  text "Layer" at 236.537,198.691 h1.52
  text "Name" at 246.949,198.691 h1.52
  text "Material" at 282.753,198.691 h1.52
  text "Thickness" at 304.591,198.691 h1.52
  text "Constant" at 321.097,198.691 h1.52
  text "Board Layer Stack" at 335.571,198.691 h1.52
  text "Top Overlay" at 246.949,195.643 h1.52
  text "Top Solder" at 246.949,192.595 h1.52
  text "Solder Resist" at 282.753,192.595 h1.52
  text "0.40mil" at 304.591,192.595 h1.52
  text "3.5" at 321.097,192.595 h1.52
  text "1" at 236.537,189.547 h1.52
  text "Layer 1 - Top Layer" at 246.949,189.547 h1.52
  text "2.80mil" at 304.591,189.547 h1.52
  text "Dielectric 1" at 246.949,186.499 h1.52
  text "FR-4 High Tg" at 282.753,186.499 h1.52
  text "6.00mil" at 304.591,186.499 h1.52
  text "4.2" at 321.097,186.499 h1.52
  text "2" at 236.537,183.451 h1.52
  text "Layer 2 - GND" at 246.949,183.451 h1.52
  text "1.40mil" at 304.591,183.451 h1.52
  text "Dielectric 2" at 246.949,180.403 h1.52
  text "FR-4 High Tg" at 282.753,180.403 h1.52
  text "41.00mil" at 304.591,180.403 h1.52
  text "4.2" at 321.097,180.403 h1.52
  text "3" at 236.537,177.356 h1.52
  text "Layer 3 - Signal" at 246.949,177.356 h1.52
  text "1.40mil" at 304.591,177.356 h1.52
  text "Dielectric 3" at 246.949,174.308 h1.52
  text "FR-4 High Tg" at 282.753,174.308 h1.52
  text "6.00mil" at 304.591,174.308 h1.52
  text "4.2" at 321.097,174.308 h1.52
  text "4" at 236.537,171.26 h1.52
  text "Layer 4 - Bottom Layer" at 246.949,171.26 h1.52
  text "2.80mil" at 304.591,171.26 h1.52
  text "Bottom Solder" at 246.949,168.212 h1.52
  text "Solder Resist" at 282.753,168.212 h1.52
  text "0.40mil" at 304.591,168.212 h1.52
  text "3.5" at 321.097,168.212 h1.52
  text "Bottom Overlay" at 246.949,165.163 h1.52
  text ".Layer_Name" at 14.148,-22.314 h1.52
M13 Component Bodies Top:
  text ".Layer_Name" at 14.148,-22.314 h1.52
M15 Courtyards Top:
  text ".Layer_Name" at 14.148,-22.314 h1.52
M17 Embedded Cavity:
  text ".Layer_Name" at 14.148,-22.314 h1.52
M18 Embedded Assembly:
  text ".Layer_Name" at 14.148,-22.314 h1.52
M19 Embedded Keepout:
  text ".Layer_Name" at 14.148,-22.314 h1.52

## Dimensions
-0.508,-0.508 to -0.508,101.092 on M2 Board Dimensions
-0.508,-0.508 to 125.222,-0.508 on M2 Board Dimensions
-0.508,-10.668 to 24.892,-10.668 on M2 Board Dimensions

## Text inside footprints (layer, text, board x,y; h text height)
J26: M1 Board Outline "Board Edge" at 95.269,-1.388 h0.7
Logo8: Top Overlay "For evaluation only; not FCC approved for resale." at 6.424,1.044 h1.52